# Altium PCB PCB1.PcbDoc (part 3 of 3)
Units mm, origin at the board's own origin, x right, y up, seen from the top; angles counter-clockwise.
Board outline 160 x 120 mm, 2 copper layers (Top Layer, Bottom Layer), stack 1.575 mm thick; 297 components, 194 nets, 893 pads, 504 vias.
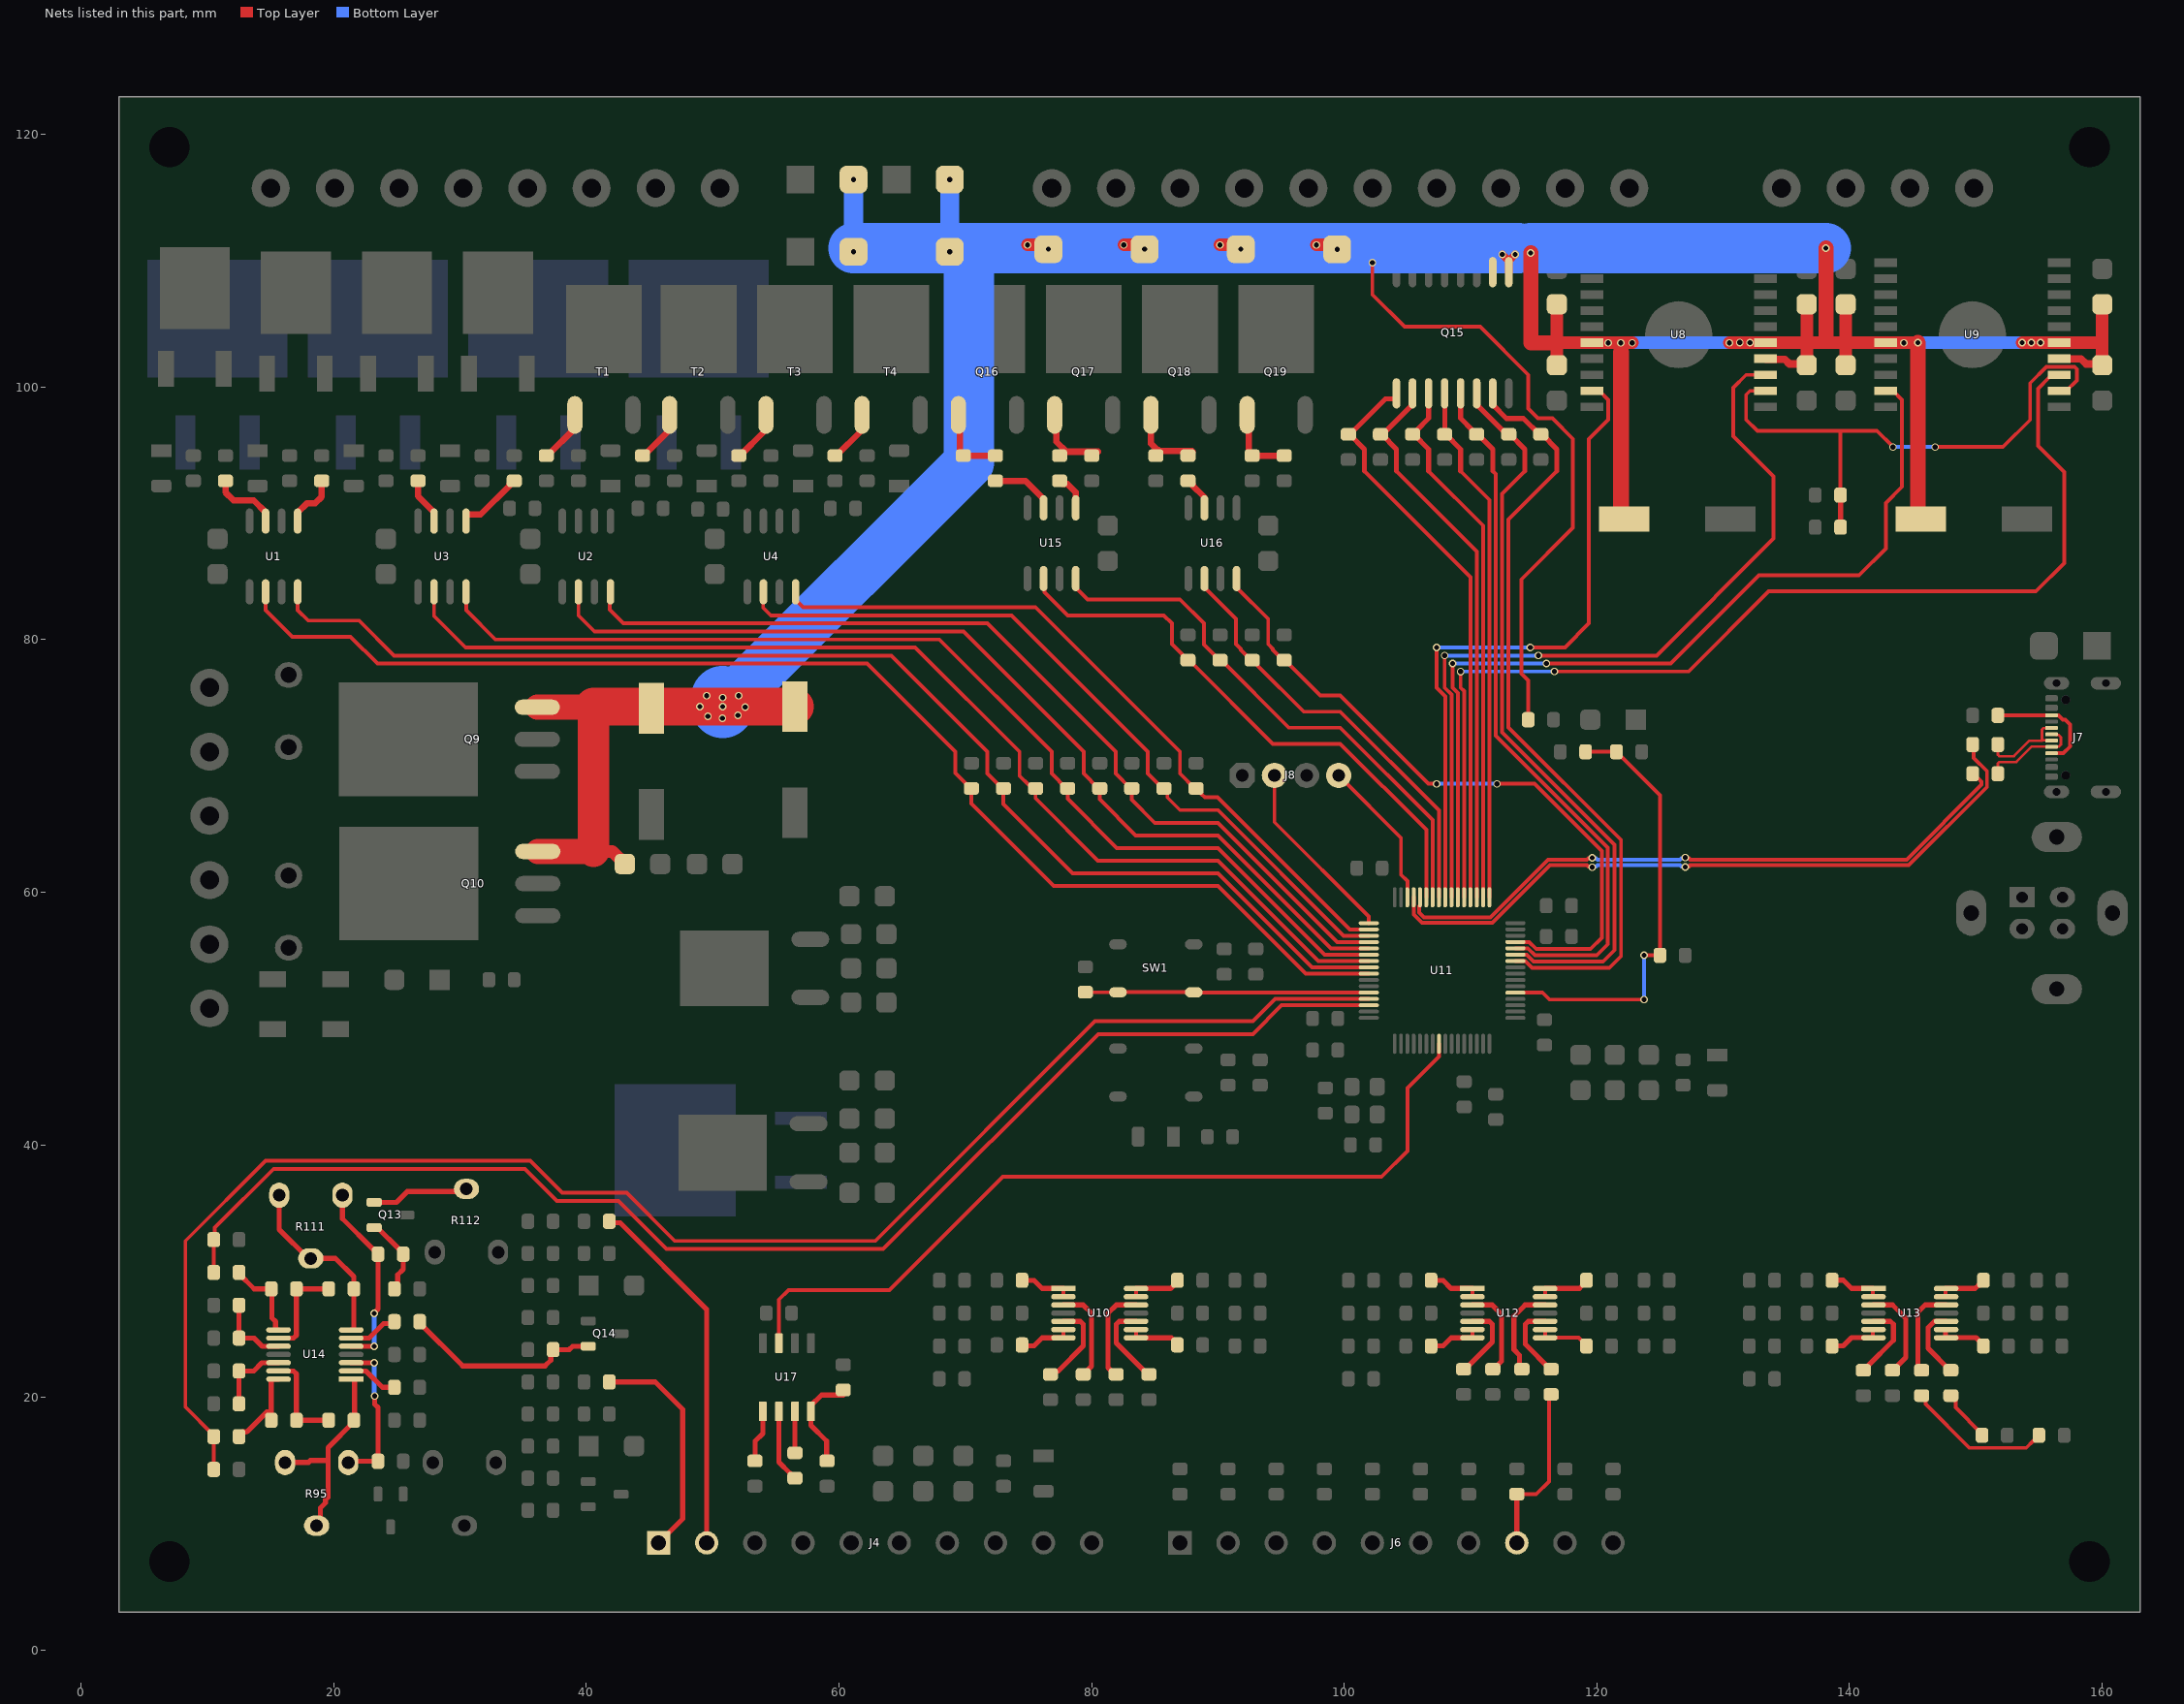
[diagram p3: the nets of this part, all layers, seen from the top]

## Via types
v1: diameter 0.6, hole 0.4, Top Layer to Bottom Layer, 445 vias
v2: diameter 0.7, hole 0.4, Top Layer to Bottom Layer, 59 vias

## Nets (pads, with @x,y where several pads share a name; then routed paths per layer and width w, separated by ;. In a path a pad name is that pad's centre, name@x,y a point inside that pad or via, vN(x,y) a via of type N, cw(c..) or ccw(c..) an arc to the next point about the centre after c; other vN are vias at no path point) (continued)
NetQ13_1: Q13.1 R112.2 | length 7.7
  Top Layer w0.4: Q13.1@23.2,35.444 24.971,35.444 25.821,36.294 30.3,36.294 R112.2@30.508,36.503
NetQ13_2: Q13.2 R109.2 R110.1 | length 6.2
  Top Layer w0.4: Q13.2@23.2,33.444 23.45,33.444 25.189,31.705 25.204,31.705 25.5,31.409 R110.1@25.5,31.336 25.5,30.136 25.069,29.705 25.069,28.863 R109.2@24.8,28.594
NetQ14_2: Q14.2 R118.2 R121.1 | length 15.9
  Top Layer w0.4: R121.1@26.8,25.994 26.8,25.894 30.199,22.495 36.735,22.495 37.194,22.954 37.194,23.604 R118.2@37.37,23.78 38.64,23.78 38.91,24.05 Q14.2@40.15,24.05
NetQ15_1: Q15.1 R125.2 U11.36 | length 46
  Top Layer w0.3: 101.6,93.345 110.005,84.94 110.005,72.598 110,72.593 U11.36@110,59.6
  Top Layer w0.4: R125.2@100.33,96.25 R125.2@100.43,96.25 ; 101.6,93.345 101.6,95.08 R125.2@100.43,96.25 ; Q15.1@104.14,99.495 104.14,99.152 104.048,99.06 103.274,99.06 100.764,96.55 100.757,96.55 100.457,96.25 R125.2@100.43,96.25
NetQ15_2: Q15.2 R126.2 U11.35 | length 44.2
  Top Layer w0.3: 104.14,93.345 110.5,86.985 110.5,77.235 110.505,77.23 110.505,76.44 110.5,76.435 U11.35@110.5,59.6
  Top Layer w0.4: R126.2@102.87,96.25 R126.2@102.97,96.25 ; 104.14,93.345 104.14,95.08 R126.2@102.97,96.25 ; Q15.2@105.41,99.495 105.41,98.595 103.065,96.25 R126.2@102.97,96.25
NetQ15_3: Q15.3 R127.2 U11.34 | length 42.8
  Top Layer w0.3: 106.68,93.345 111,89.025 U11.34@111,59.6
  Top Layer w0.4: R127.2@105.41,96.25 R127.2@105.483,96.25 ; 106.68,93.345 106.68,95.08 105.51,96.25 R127.2@105.483,96.25 ; Q15.3@106.68,99.495 106.68,97.52 105.779,96.619 105.779,96.546 R127.2@105.483,96.25
NetQ15_4: Q15.4 R128.2 U11.33 | length 41.4
  Top Layer w0.3: 109.22,93.345 111.5,91.065 U11.33@111.5,59.6
  Top Layer w0.4: Q15.4@107.95,99.495 107.98,99.465 107.98,96.28 R128.2@107.95,96.25 108.05,96.25 109.22,95.08 109.22,93.345
NetQ15_5: Q15.5 R129.2 U11.28 | length 56.5
  Top Layer w0.3: 111.76,93.345 112,93.105 112,72.404 120.876,63.528 120.876,55.876 120,55 115.1,55 114.55,55.55 U11.28@113.55,55.55
  Top Layer w0.4: Q15.5@109.22,99.495 109.22,97.52 110.121,96.619 110.121,96.546 110.417,96.25 R129.2@110.49,96.25 110.59,96.25 111.76,95.08 111.76,93.345
NetQ15_6: Q15.6 R130.2 U11.27 | length 58.7
  Top Layer w0.3: U11.27@113.55,55.05 114.446,55.05 114.996,54.5 120.5,54.5 121.412,55.412 121.412,63.754 112.5,72.666 112.5,91.545 114.3,93.345
  Top Layer w0.4: Q15.6@110.49,99.495 110.49,98.595 112.566,96.519 112.761,96.519 R130.2@113.03,96.25 113.13,96.25 114.3,95.08 114.3,93.345
NetQ15_7: Q15.7 R131.2 U11.26 | length 61.9
  Top Layer w0.3: U11.26@113.55,54.55 114.342,54.55 114.892,54 121,54 121.92,54.92 121.92,64.135 113,73.055 113,89.505 116.84,93.345
  Top Layer w0.4: Q15.7@111.76,99.495 111.76,98.595 112.842,97.513 114.187,97.513 115.45,96.25 R131.2@115.57,96.25 115.67,96.25 116.84,95.08 116.84,93.345
NetQ15_10: Q15.10
NetQ16_1: Q16.1 R132.1 R133.2 | length 5.6
  Top Layer w0.5: Q16.1@69.455,97.79 69.589,97.656 69.589,94.82 69.839,94.57 R132.1@72.08,94.57
NetQ17_1: Q17.1 R134.1 R135.2 | length 5.8
  Top Layer w0.5: Q17.1@77.075,97.79 77.209,97.656 77.209,95.666 77.995,94.88 78.095,94.88 R135.2@80.5,94.88
NetQ18_1: Q18.1 R138.1 R139.2 | length 5.8
  Top Layer w0.5: Q18.1@84.695,97.79 84.695,95.528 85.22,95.003 85.32,95.003 85.381,94.942 87.939,94.942 R138.1@88,94.88
NetQ19_1: Q19.1 R140.1 R143.2 | length 5.9
  Top Layer w0.5: Q19.1@92.315,97.79 92.449,97.656 92.449,94.82 92.699,94.57 R143.2@95.25,94.57
NetR1_2: R1.2 U1.7 | length 5.4
  Top Layer w0.5: R1.2@11.43,92.57 11.43,91.665 12.065,91.03 13.66,91.03 14.605,90.085 U1.7@14.605,89.385
NetR2_1: R2.1 T1.1 | length 3.2
  Top Layer w0.5: R2.1@36.83,94.57 36.93,94.57 T1.1@39.089,96.729
NetR3_2: R3.2 U1.5 | length 4.4
  Top Layer w0.5: U1.5@17.145,89.385 17.145,90.058 17.898,90.811 18.541,90.811 19.05,91.32 R3.2@19.05,92.57
NetR5_2: R5.2 U1.4 U11.56 | length 99.7
  Top Layer w0.3: U1.4@17.145,83.785 17.145,82.335 17.975,81.505 22,81.505 24.765,78.74 64.135,78.74 71.755,71.12 71.755,69.385 72.925,68.215 R5.2@73.025,68.215 73.025,66.975 78.5,61.5 90,61.5 97.45,54.05 U11.56@101.95,54.05
NetR6_2: R6.2 U1.2 U11.57 | length 102.4
  Top Layer w0.3: U1.2@14.605,83.785 14.605,82.335 16.705,80.235 21.331,80.235 23.461,78.105 62.23,78.105 69.215,71.12 69.215,69.439 70.439,68.215 R6.2@70.485,68.215 70.485,67.015 77,60.5 90,60.5 96.95,53.55 U11.57@101.95,53.55
NetR7_2: R7.2 U2.4 U11.52 | length 74
  Top Layer w0.3: U2.4@41.91,83.785 41.853,83.728 41.853,82.363 42.935,81.28 71.755,81.28 81.915,71.12 81.915,69.385 83.085,68.215 R7.2@83.185,68.215 83.185,67.315 85,65.5 90,65.5 99.45,56.05 U11.52@101.95,56.05
NetR8_2: R8.2 U2.2 U11.53 | length 76.9
  Top Layer w0.3: U2.2@39.37,83.785 39.373,83.782 39.373,81.912 40.64,80.645 69.85,80.645 79.375,71.12 79.375,69.385 80.545,68.215 R8.2@80.645,68.215 80.645,67.355 83.5,64.5 90,64.5 98.95,55.55 U11.53@101.95,55.55
NetR9_1: R9.1 T2.1 | length 4
  Top Layer w0.5: R9.1@44.45,94.57 44.55,94.57 46.461,96.481 T2.1@46.461,97.656
NetR10_2: R10.2 U3.7 | length 3.7
  Top Layer w0.5: R10.2@26.67,92.57 26.67,91.355 27.94,90.085 U3.7@27.94,89.385
NetR12_2: R12.2 U3.5 | length 5.5
  Top Layer w0.5: U3.5@30.48,89.385 30.48,89.864 30.526,89.91 31.63,89.91 33.94,92.22 33.94,92.32 34.19,92.57 R12.2@34.29,92.57
NetR13_2: R13.2 U3.4 U11.54 | length 85.7
  Top Layer w0.3: U3.4@30.48,83.785 30.481,82.335 32.806,80.01 67.945,80.01 76.835,71.12 76.835,69.385 78.005,68.215 R13.2@78.105,68.215 78.105,67.395 82,63.5 90,63.5 98.45,55.05 U11.54@101.95,55.05
NetR14_2: R14.2 U3.2 U11.55 | length 88.8
  Top Layer w0.3: U3.2@27.94,83.785 27.94,81.87 30.435,79.375 66.04,79.375 74.295,71.12 74.295,69.215 75.007,68.503 75.277,68.503 R14.2@75.565,68.215 75.565,67.435 80.5,62.5 90,62.5 97.95,54.55 U11.55@101.95,54.55
NetR15_2: R15.2 U4.4 U11.50 | length 57.9
  Top Layer w0.3: U4.4@56.562,83.785 56.534,83.757 56.534,83.166 57.15,82.55 75.565,82.55 86.995,71.12 86.995,69.385 88.165,68.215 R15.2@88.265,68.215 88.311,68.215 88.715,67.811 88.715,67.765 88.965,67.515 89.985,67.515 100.45,57.05 U11.50@101.95,57.05
NetR16_2: R16.2 U4.2 U11.51 | length 61.3
  Top Layer w0.3: U4.2@54.022,83.785 53.994,83.757 53.994,82.531 54.61,81.915 73.66,81.915 84.455,71.12 84.455,69.385 85.625,68.215 R16.2@85.725,68.215 86,67.94 86,67.5 87,66.5 90,66.5 99.95,56.55 U11.51@101.95,56.55
NetR17_1: R17.1 T3.1 | length 4.2
  Top Layer w0.5: R17.1@52.07,94.57 52.17,94.57 54.081,96.481 54.081,97.656 T3.1@54.215,97.79
NetR19_1: R19.1 T4.1 | length 4.2
  Top Layer w0.5: R19.1@59.69,94.57 59.79,94.57 61.701,96.481 61.701,97.656 T4.1@61.835,97.79
NetR32_1: R32.1 R33.1 U8.2 U9.2 | length 45.4
  Top Layer w0.3: U8.2@133.35,99.695 132.125,99.695 131.82,99.39 131.82,97.415 132.715,96.52 139.295,96.52 ; R32.1@139.295,91.44 139.295,96.52 ; v1(143.45,95.25) 142.18,96.52 139.295,96.52 ; v1(146.79,95.25) 152.16,95.25 154.305,97.395 154.305,100.312 155.593,101.6 157.839,101.6 158.015,101.424 158.015,100.53 157.18,99.695 U9.2@156.605,99.695
  Top Layer w0.4: R33.1@139.295,88.9 R32.1@139.295,91.44
  Bottom Layer w0.3: v1(143.45,95.25) v1(146.79,95.25)
NetR34_1: R34.1 U10.3 | length 7.7
  Top Layer w0.4: U10.3@77.77,27.32 77.774,27.316 79.349,27.316 79.995,26.67 79.995,22.47 79.714,22.189 79.714,22.116 79.418,21.82 R34.1@79.345,21.82
NetR35_2: R35.2 U10.1 U10.2 | length 4.4
  Top Layer w0.3: U10.2@77.77,27.97 U10.1@77.77,28.62
  Top Layer w0.4: R35.2@74.495,29.27 74.643,29.27 74.643,29.418 74.791,29.27 75.445,29.27 76.095,28.62 U10.1@77.77,28.62
NetR38_1: R38.1 U10.5 | length 6.9
  Top Layer w0.4: R38.1@76.745,21.82 77.014,22.089 77.364,22.089 79.345,24.07 79.345,25.786 79.111,26.02 U10.5@77.77,26.02
NetR39_2: R39.2 U10.6 U10.7 | length 4.3
  Top Layer w0.3: U10.7@77.77,24.72 U10.6@77.77,25.37
  Top Layer w0.4: R39.2@74.495,24.152 74.495,24.07 75.445,24.07 76.088,24.713 76.981,24.713 76.984,24.716 77.766,24.716 U10.7@77.77,24.72
NetR42_1: R42.1 U10.12 | length 7.7
  Top Layer w0.4: R42.1@81.945,21.82 81.829,21.82 81.295,22.354 81.295,26.67 81.941,27.316 83.516,27.316 U10.12@83.52,27.32
NetR43_2: R43.2 U10.13 U10.14 | length 4.3
  Top Layer w0.3: U10.13@83.52,27.97 U10.14@83.52,28.62
  Top Layer w0.4: U10.14@83.52,28.62 86.261,28.62 86.795,29.154 R43.2@86.795,29.27
NetR47_1: R47.1 U10.10 | length 6.8
  Top Layer w0.4: U10.10@83.52,26.02 83.516,26.016 82.179,26.016 81.945,25.782 81.945,24.32 84.445,21.82 R47.1@84.545,21.82
NetR48_2: R48.2 U10.8 U10.9 | length 4.2
  Top Layer w0.3: U10.8@83.52,24.72 U10.9@83.52,25.37
  Top Layer w0.4: U10.8@83.52,24.72 86.303,24.72 86.795,24.228 R48.2@86.795,24.155
NetR50_2: R50.2 SW1.2 SW1.3 U11.60 | length 22.5
  Top Layer w0.3: R50.2@79.502,52.086 79.513,52.075 SW1.2@82.09,52.075 82.115,52.1 88.065,52.1 88.115,52.05 U11.60@101.95,52.05
NetR53_1: R53.1 U12.3 | length 7.3
  Top Layer w0.4: U12.3@110.155,27.32 110.159,27.316 111.734,27.316 112.467,26.583 112.467,22.867 111.836,22.236 R53.1@111.763,22.236
NetR54_2: R54.2 U12.1 U12.2 | length 4.2
  Top Layer w0.3: U12.2@110.155,27.97 U12.1@110.155,28.62
  Top Layer w0.4: R54.2@106.88,29.27 107.83,29.27 108.48,28.62 U12.1@110.155,28.62
NetR59_1: R59.1 U12.5 | length 6.2
  Top Layer w0.4: R59.1@109.455,22.236 109.582,22.236 111.73,24.384 111.73,25.786 111.496,26.02 U12.5@110.155,26.02
NetR60_2: R60.2 U12.6 U12.7 | length 4.2
  Top Layer w0.3: U12.7@110.155,24.72 U12.6@110.155,25.37
  Top Layer w0.4: R60.2@106.88,24.07 107.83,24.07 108.473,24.713 109.366,24.713 109.369,24.716 110.151,24.716 U12.7@110.155,24.72
NetR65_1: R65.1 U12.12 | length 7.3
  Top Layer w0.4: R65.1@114.072,22.236 113.88,22.427 113.88,23.336 113.446,23.77 113.446,26.436 114.326,27.316 115.901,27.316 U12.12@115.905,27.32
NetR69_2: R69.2 U12.13 U12.14 | length 4.2
  Top Layer w0.3: U12.13@115.905,27.97 U12.14@115.905,28.62
  Top Layer w0.4: U12.14@115.905,28.62 117.88,28.62 117.892,28.632 118.614,28.632 119.18,29.197 R69.2@119.18,29.27
NetR74_1: R74.1 U12.10 | length 6.1
  Top Layer w0.4: U12.10@115.905,26.02 115.901,26.016 114.564,26.016 114.33,25.782 114.33,24.213 116.307,22.236 R74.1@116.38,22.236
NetR75_2: R75.2 U12.8 U12.9 | length 4.2
  Top Layer w0.3: U12.9@115.905,25.37 U12.8@115.905,24.72 118.576,24.72 119.18,24.116 R75.2@119.18,24.07
NetR77_1: R77.1 U13.3 | length 7.6
  Top Layer w0.4: U13.3@141.905,27.32 143.41,27.32 144.455,26.275 144.455,23.15 143.814,22.509 143.814,22.472 143.486,22.145 R77.1@143.414,22.145
NetR78_2: R78.2 U13.1 U13.2 | length 4
  Top Layer w0.3: U13.1@141.851,28.624 141.851,27.974 U13.2@141.905,27.97
  Top Layer w0.4: R78.2@138.63,29.27 138.63,29.274 R78.2@138.704,29.274 ; R78.2@138.852,29.274 139.506,29.274 140.156,28.624 U13.1@141.851,28.624
NetR81_1: R81.1 U13.5 | length 6.3
  Top Layer w0.4: R81.1@141.105,22.145 141.178,22.145 141.474,22.441 141.474,22.514 143.48,24.52 143.48,25.782 143.246,26.016 141.909,26.016 U13.5@141.905,26.02
NetR82_2: R82.2 U13.6 U13.7 | length 4.2
  Top Layer w0.3: U13.7@141.851,24.724 141.851,25.374 U13.6@141.905,25.37
  Top Layer w0.4: R82.2@138.63,24.07 138.63,24.074 139.506,24.074 140.156,24.724 U13.7@141.851,24.724
NetR85_1: R85.1 U13.12 | length 7.2
  Top Layer w0.4: R85.1@145.722,22.145 145.43,22.437 145.43,26.748 146.002,27.32 147.598,27.32 147.602,27.324 U13.12@147.655,27.32
NetR85_2: R85.2 R87.1 | length 11.7
  Top Layer w0.3: R85.2@145.722,20.145 146.033,19.833 146.033,19.467 149.5,16 154,16 154.55,16.55 154.596,16.55 155,16.954 R87.1@155,17
NetR86_2: R86.2 U13.13 U13.14 | length 4.1
  Top Layer w0.3: U13.14@147.602,28.624 147.602,27.974 U13.13@147.655,27.97
  Top Layer w0.4: U13.14@147.655,28.62 147.602,28.624 147.655,28.624 149.959,28.624 150.236,28.901 150.309,28.901 150.605,29.197 R86.2@150.605,29.27
NetR89_1: R89.1 U13.10 | length 5.8
  Top Layer w0.4: U13.10@147.655,26.02 147.598,26.02 147.594,26.016 146.726,26.016 146.223,25.513 146.223,23.879 147.957,22.145 R89.1@148.03,22.145
NetR89_2: R89.2 R91.1 | length 4.2
  Top Layer w0.3: R89.2@148.03,20.145 148.063,20.145 148.405,19.803 148.405,19.195 150.5,17.1 R91.1@150.5,17
NetR90_2: R90.2 U13.8 U13.9 | length 4.2
  Top Layer w0.3: U13.9@147.602,25.374 U13.9@147.655,25.37
  Top Layer w0.4: U13.9@147.602,25.374 U13.8@147.602,24.724 ; U13.8@147.655,24.72 U13.8@147.602,24.724 ; R90.2@150.731,24.024 150.031,24.724 U13.8@147.602,24.724
NetR94_2: R94.2 R95.1 U14.3 | length 12.1
  Top Layer w0.4: R95.1@21.15,14.844 21.25,14.944 R94.2@23.5,14.944 23.5,19.194 23.238,19.456 v1(23.238,20.106) ; U14.3@21.38,22.744 v1(23.2,22.744)
  Bottom Layer w0.4: v1(23.2,22.744) 23.2,20.144 v1(23.238,20.106)
NetR95_2: R95.2 R95.3 R97.1 U14.1 | length 16.2
  Top Layer w0.4: R95.3@16.15,14.844 18,14.844 18.156,15 19.551,15 ; R95.2@18.65,9.844 18.94,10.135 18.94,11.244 19.351,11.655 19.351,11.894 19.551,12.094 19.551,15 ; U14.1@21.642,21.329 21.642,18.236 R97.1@21.6,18.194 21.6,18.073 19.551,16.024 19.551,15
NetR97_2: R97.2 R98.1 U14.13 | length 7.7
  Top Layer w0.4: U14.13@15.629,22.094 16.816,22.094 17.05,21.86 17.05,18.844 R98.1@17.05,18.194 R97.2@19.6,18.194
NetR98_2: R98.2 R99.1 U14.14 | length 7.2
  Top Layer w0.4: R99.1@12.5,16.894 12.5,16.967 12.796,17.263 13.042,17.263 13.077,17.298 13.15,17.298 14.686,18.834 15.05,18.834 ; R98.2@15.05,18.194 15.05,18.834 ; U14.14@15.629,21.444 15.639,21.435 15.629,21.435 15.05,21.435 15.05,18.834
NetR99_2: R99.2 R101.2 U11.61 | length 126.2
  Top Layer w0.3: R101.2@10.5,14.294 10.5,16.498 10.644,16.642 10.752,16.642 R99.2@10.5,16.894 10.5,16.994 8.255,19.239 8.255,32.385 14.605,38.735 35.56,38.735 38.1,36.195 43.18,36.195 46.99,32.385 50.165,32.385 62.865,32.385 80.264,49.784 92.784,49.784 94.55,51.55 U11.61@101.95,51.55
NetR100_1: R100.1 R103.1 U14.12 | length 6
  Top Layer w0.4: R103.1@12.5,19.494 R100.1@12.5,22.094 13.662,22.094 14.308,22.74 15.626,22.74 U14.12@15.629,22.744
NetR105_2: R105.2 U14.2 | length 4
  Top Layer w0.4: U14.2@21.38,22.094 22.55,22.094 23.85,20.794 R105.2@24.8,20.794
NetR110_2: R110.2 R111.1 U14.5 | length 15.1
  Top Layer w0.4: R111.1@20.688,36.003 20.688,34.148 23.131,31.705 23.204,31.705 23.5,31.409 R110.2@23.5,31.336 23.5,26.998 23.2,26.698 v1(23.2,26.644) ; U14.5@21.38,24.044 v1(23.2,24.044)
  Bottom Layer w0.4: v1(23.2,24.044) v1(23.2,26.644)
NetR111_2: R111.2 R111.3 R113.1 U14.7 | length 14.4
  Top Layer w0.4: R111.3@15.688,36.003 15.688,33.303 17.988,31.003 R111.2@18.009,31.003 ; R111.2@18.188,31.003 20.142,31.003 21.584,29.56 21.584,28.61 R113.1@21.6,28.594 ; U14.7@21.38,25.344 21.59,25.344 21.6,25.354 R113.1@21.6,28.594 ; R113.1@21.6,28.624 R113.1@21.6,28.594
NetR113_2: R113.2 R114.1 U14.9 | length 6.8
  Top Layer w0.4: U14.9@15.905,24.694 16.816,24.694 17.05,24.929 17.05,27.944 ; R114.1@17.05,28.594 R113.2@19.6,28.594
NetR114_2: R114.2 R115.1 U14.8 | length 6.8
  Top Layer w0.4: R115.1@12.5,29.894 12.5,29.794 13.7,28.594 R114.2@15.05,28.594 15.104,28.541 15.104,26.291 15.4,25.994 15.4,25.354 15.41,25.344 U14.8@15.629,25.344
NetR115_2: R115.2 R117.2 U11.62 | length 108.2
  Top Layer w0.3: U11.62@101.95,51.05 95.05,51.05 92.768,48.768 80.518,48.768 63.5,31.75 50.165,31.75 46.355,31.75 42.545,35.56 37.684,35.56 35.144,38.1 15.24,38.1 10.568,33.428 10.568,32.562 R117.2@10.5,32.494 R115.2@10.5,30.291 ; R115.2@10.5,30.291 10.644,30.147 10.752,30.147 R115.2@10.5,29.894 R115.2@10.5,30.291
NetR116_1: R116.1 R119.1 U14.10 | length 6
  Top Layer w0.4: R119.1@12.5,27.294 R116.1@12.5,24.694 13.696,24.694 14.346,24.044 U14.10@15.629,24.044
NetR121_2: R121.2 U14.6 | length 3.7
  Top Layer w0.4: U14.6@21.622,24.694 22.8,24.694 23.949,25.843 24.649,25.843 R121.2@24.8,25.994
NetR136_2: R136.2 U11.42 U15.4 | length 43.7
  Top Layer w0.3: U15.4@78.74,84.83 78.74,84.146 79.701,83.185 86.995,83.185 88.9,81.28 88.9,79.599 90.124,78.375 R136.2@90.17,78.375 90.27,78.375 95.62,73.025 99.695,73.025 107,65.72 107,61.17 107.004,61.166 107.004,60.334 107,60.33 U11.42@107,59.6
NetR137_2: R137.2 U11.43 U15.2 | length 45.5
  Top Layer w0.3: U15.2@76.2,84.83 76.257,84.773 76.257,83.763 78.105,81.915 85.725,81.915 86.36,81.28 86.36,79.645 87.18,78.825 87.18,78.779 87.584,78.375 R137.2@87.63,78.375 87.73,78.375 94.35,71.755 99.695,71.755 106.5,64.95 U11.43@106.5,59.6
NetR141_2: R141.2 U11.29 U16.4 | length 53.8
  Top Layer w0.3: U16.4@91.477,84.83 91.477,84.13 93.98,81.627 93.98,79.645 94.349,79.276 94.349,79.176 95.15,78.375 R141.2@95.25,78.375 95.296,78.375 98.106,75.565 99.695,75.565 106.68,68.58 v1(107.315,68.58) ; v1(112.1,68.58) 115.062,68.58 120.396,63.246 120.396,56.396 119.5,55.5 115.204,55.5 114.654,56.05 U11.29@113.55,56.05
  Bottom Layer w0.3: v1(107.315,68.58) v1(112.1,68.58)
NetR142_2: R142.2 U11.41 U16.2 | length 34.7
  Top Layer w0.3: U16.2@88.937,84.83 88.937,84.13 91.44,81.627 91.44,79.645 91.809,79.276 91.809,79.176 92.61,78.375 R142.2@92.71,78.375 92.756,78.375 93.16,77.971 93.16,77.925 96.79,74.295 99.695,74.295 107.5,66.49 U11.41@107.5,59.6
NetR144_1: R144.1 U17.1 | length 3.8
  Top Layer w0.4: R144.1@53.34,15.37 53.366,15.396 53.366,16.536 53.975,17.145 U17.1@53.975,18.89
NetR145_2: R145.2 R146.2 U17.4 | length 7.4
  Top Layer w0.4: R145.2@59.055,15.37 59.029,15.396 59.029,16.536 57.785,17.78 U17.4@57.785,18.89 57.785,19.365 58.61,20.19 R146.2@60.338,20.19
NetR147_1: R147.1 U17.3 | length 3.3
  Top Layer w0.4: R147.1@56.515,15.605 U17.3@56.515,18.89
NetR147_2: R147.2 U17.2 | length 5.9
  Top Layer w0.4: U17.2@55.245,18.89 55.245,14.875 56.146,13.974 56.146,13.901 56.442,13.605 R147.2@56.515,13.605
NetU8_3: U8.3 U11.39 | length 65.5
  Top Layer w0.3: v1(107.95,78.74) 107.95,76.2 108.5,75.65 U11.39@108.5,59.6 ; v1(115.369,78.74) 124.74,78.74 134,88 134,92.915 130.81,96.105 130.81,99.955 131.82,100.965 U8.3@133.35,100.965
  Bottom Layer w0.3: v1(107.95,78.74) v1(115.369,78.74)
NetU8_19: U8.19 U11.40 | length 52.8
  Top Layer w0.3: v1(107.315,79.375) 107.315,76.2 108,75.515 U11.40@108,59.6 ; v1(114.734,79.375) 117.472,79.375 119.38,81.283 119.38,95.885 120.91,97.415 120.91,98.98 120.195,99.695 U8.19@119.62,99.695
  Bottom Layer w0.3: v1(107.315,79.375) v1(114.734,79.375)
NetU9_3: U9.3 U11.37 | length 86.1
  Top Layer w0.3: v1(109.22,77.47) 109.22,76.2 109.5,75.92 U11.37@109.5,59.6 ; v1(116.65,77.48) 127.264,77.48 133.604,83.82 154.764,83.82 157,86.056 157,93.277 154.94,95.337 154.94,99.875 155.84,100.775 156.03,100.965 U9.3@156.605,100.965
  Bottom Layer w0.3: v1(109.22,77.47) 109.225,77.475 116.645,77.475 v1(116.65,77.48)
NetU9_19: U9.19 U11.38 | length 70.6
  Top Layer w0.3: v1(108.585,78.105) 108.585,76.2 109,75.785 U11.38@109,59.6 ; v1(116.004,78.105) 125.857,78.105 132.842,85.09 140.76,85.09 142.875,87.205 142.875,90.805 144.165,92.095 144.165,98.98 143.45,99.695 U9.19@142.875,99.695
  Bottom Layer w0.3: v1(108.585,78.105) v1(116.004,78.105)
NetU11_8: U11.8 U17.7 | length 67.6
  Top Layer w0.3: U17.7@55.245,24.29 55.245,27.745 56,28.5 64,28.5 72.965,37.465 102.965,37.465 105,39.5 105,44.5 107.5,47 U11.8@107.5,48
OIL-SENSOR: J6.8 R73.1 R74.2 | length 13.8
  Top Layer w0.3: R73.1@113.665,12.335 115.205,12.335 116.205,13.335 116.205,20.061 R74.2@116.38,20.236
  Top Layer w0.4: J6.8@113.665,8.48 R73.1@113.665,12.335
PA_13: J8.4 U11.46 | length 11.9
  Top Layer w0.3: J8.4@99.56,69.25 104.5,64.31 104.5,61.368 105,60.868 U11.46@105,59.6
PA_14: J8.2 U11.49 | length 14.8
  Top Layer w0.3: J8.2@94.48,69.25 94.48,65.54 101.95,58.07 U11.49@101.95,57.55
PWM_GATE_1: R138.2 U16.7 | length 2.7
  Top Layer w0.5: R138.2@87.63,92.57 87.73,92.57 87.98,92.32 87.98,92.22 88.918,91.282 88.918,90.449 U16.7@88.937,90.43
PWM_GATE_2: R134.2 U15.5 | length 2.9
  Top Layer w0.5: R134.2@77.47,92.57 77.72,92.32 78.085,92.32 78.74,91.665 U15.5@78.74,90.43
PWM_GATE_3: R132.2 U15.7 | length 5.1
  Top Layer w0.5: R132.2@72.39,92.57 74.76,92.57 76.2,91.13 U15.7@76.2,90.43
USB_CC: J7.A5 J7.B5 R68.2 | length 9.5
  Top Layer w0.3: R68.2@151.75,74 153.871,74 156.554,74 156.906,73.648 157.1,73.648 157.48,73.268 157.48,71.53 156.95,71 J7.A5@156,71
USB_D_N: J7.A7 J7.B7 R55.2 | length 7.8
  Top Layer w0.203: R55.2@151.75,69.383 151.75,70.19 151.869,70.309 153.219,70.309 154.453,71.543 156,71.543 156.599,71.543 156.748,71.692 156.748,72.271 156.567,72.452 156.398,72.452 156.35,72.5 J7.A7@156,72.5
USB_D_P: J7.A6 J7.B6 R52.2 | length 7.3
  Top Layer w0.203: R52.2@151.75,71.692 151.75,70.885 151.869,70.766 153.03,70.766 154.263,72 155.25,72 ; J7.A6@156,72 155.979,72.021 155.25,72.021 155.25,72.881 155.369,73 J7.B6@156,73
USB_N: R55.1 U11.44 | length 51.8
  Top Layer w0.3: U11.44@106,59.6 106,58.95 105.927,58.877 105.927,58.4 106.327,58 111.567,58 116.132,62.564 119.233,62.564 119.337,62.669 119.577,62.669 v1(119.634,62.726) ; v1(127,62.737) 127.057,62.68 127.297,62.68 127.401,62.576 144.527,62.576 150.46,68.509 150.46,68.758 150.223,68.995 150.092,68.995 149.75,69.338 R55.1@149.75,69.383
  Bottom Layer w0.3: v1(119.634,62.726) 119.691,62.669 119.931,62.669 120.035,62.564 123.348,62.564 123.359,62.576 126.599,62.576 126.703,62.68 126.943,62.68 v1(127,62.737)
USB_P: R52.1 U11.45 | length 55.6
  Top Layer w0.3: U11.45@105.5,59.6 105.5,58.95 105.5,58.223 106.15,57.573 111.744,57.573 116.308,62.137 119.233,62.137 119.337,62.033 119.577,62.033 v1(119.634,61.976) ; v1(127,61.988) 127.057,62.045 127.297,62.045 127.401,62.149 144.704,62.149 150.887,68.332 150.887,69.591 149.837,70.642 149.837,71.605 R52.1@149.75,71.692
  Bottom Layer w0.3: v1(119.634,61.976) 119.691,62.033 119.931,62.033 120.035,62.137 123.525,62.137 123.536,62.149 126.599,62.149 126.703,62.045 126.943,62.045 v1(127,61.988)
VBAT: C5.1 C6.1 C19.2 C20.2 C21.1 C22.2 C23.2 C24.2 C25.2 C26.1 C27.2 C28.2 D1.2 D2.2 D3.2 D4.2 D23.2 D24.2 D25.2 D26.2 F1.1 Q9.3 Q10.3 Q15.9 R63.2 U8.4 U8.5 U8.16 U9.4 U9.5 U9.16 | length 347.3
  Top Layer w0.3: v1(102.235,109.855) 102.235,107.315 104.775,104.775 110.76,104.775 114.57,100.965 114.57,98.28 115.337,97.513 116.497,97.513 118.11,95.899 118.11,88.855 114.02,84.765 114.02,77.32 114.57,76.77 R63.2@114.57,73.66
  Top Layer w0.6: v1(112.522,110.49) 112.535,110.49 Q15.9@113.03,109.995 ; Q15.9@113.03,109.095 Q15.9@113.03,109.995 ; v1(113.538,110.49) 113.525,110.49 Q15.9@113.03,109.995 ; U8.4@133.35,102.235 133.39,102.195 134.885,102.195 135.255,101.825 136.523,101.825 C20.2@136.618,101.73 ; U9.4@156.605,102.235 158.34,102.235 158.75,101.825 159.925,101.825 C25.2@160.02,101.73
  Top Layer w1: 40.562,63.225 42.055,63.225 F1.1@43.05,62.23 ; v1(74.93,111.252) 76.238,111.252 v1(76.58,110.91) ; v1(82.55,111.252) 83.858,111.252 v1(84.2,110.91) ; v1(90.17,111.252) 91.82,111.252 91.82,111.086 91.732,110.998 v1(91.82,110.91) ; v1(97.79,111.252) 98.844,111.252 D26.2@99.318,110.778 ; C19.2@116.84,101.73 116.84,103.505 ; C23.2@116.84,106.55 116.84,103.505 ; 121.92,102.773 121.92,103.48 v1(121.9,103.5) ; v1(122.8,103.5) v1(121.9,103.5) ; v1(130.5,103.5) 130.526,103.526 v1(131.317,103.526) 132.104,103.526 v1(132.125,103.505) U8.5@133.35,103.505 136.618,103.505 ; C20.2@136.618,101.73 136.618,103.505 ; C22.2@136.618,106.55 136.618,103.505 ; C24.2@139.7,101.73 139.7,103.505 ; C28.2@139.7,106.55 139.7,103.505 ; v1(145.415,103.505) 145.41,103.5 142.88,103.5 U9.16@142.875,103.505 139.7,103.505 ; v1(153.67,103.505) v1(154.404,103.505) v1(155.138,103.505) U9.5@156.605,103.505 160.02,103.505 ; C25.2@160.02,101.73 160.02,103.505 ; C27.2@160.02,106.55 160.02,103.505 ; 116.84,103.505 U8.16@119.62,103.505 119.625,103.5 v1(120.9,103.5) v1(121.9,103.5) ; 136.618,103.505 139.7,103.505
  Top Layer w1.2: v1(114.77,110.617) 114.77,103.505 116.84,103.505 ; 138.141,104 138.141,107.106 138.145,107.11 138.145,110.994 v1(138.141,110.998)
  Top Layer w1.25: 121.92,102.773 121.92,89.78 C26.1@122.165,89.535 ; v1(145.415,103.505) 145.415,89.78 C21.1@145.66,89.535
  Top Layer w2: Q9.3@36.117,74.655 40.562,74.655 ; Q10.3@36.157,63.225 40.562,63.225
  Top Layer w2.5: 40.562,63.225 40.562,74.655
  Top Layer w3: 40.562,74.655 40.592,74.685 44.803,74.685 44.93,74.558 C5.1@45.148,74.558 ; C5.1@45.148,74.685 v1(49,74.685) v1(50.8,74.685) C6.1@56.515,74.685
  Bottom Layer w1: v1(120.9,103.5) v1(130.5,103.5) 130.526,103.526 v1(131.317,103.526) 132.039,103.526 v1@132.06,103.505 ; v1(144.3,103.5) 144.305,103.505 v1(153.67,103.505) v1(154.404,103.505) v1(155.138,103.505)
  Bottom Layer w1.5: v2@61.155,110.998 v2(61.155,116.43) ; v2@68.775,110.998 v2(68.775,116.43)
  Bottom Layer w4: v1@52.07,75.79 70.276,93.996 70.276,110.154 ; v2@61.155,110.998 68.775,110.998 71.12,110.998 76.58,110.998 82.55,110.998 90.17,110.998 97.79,110.998 102.235,110.998 113.792,110.998 ; 114.77,110.998 v1(138.141,110.998)
  Bottom Layer w5: v1(50.8,74.685) v1(50.8,75.411)
  other v1: 50.778,73.775 49.626,73.923 52,74 52.58,74.648 49.53,75.565 52.07,75.565 99.44,110.9
  other v2: 61.155,110.715 68.775,110.715
VBAT_ADC: C47.2 R71.1 R72.2 U11.21 | length 35.2
  Top Layer w0.3: U11.21@113.55,52.05 115.7,52.05 116.25,51.5 v1(123.75,51.5) ; R71.1@119.11,71.12 R72.2@121.555,71.12 121.555,71.074 121.959,70.67 122.005,70.67 125,67.675 C47.2@125,55 v1(123.75,55)
  Bottom Layer w0.3: v1(123.75,51.5) v1(123.75,55)
VR_SENSOR_1: J4.1 R106.2 | length 18.1
  Top Layer w0.4: R106.2@41.815,21.225 45.45,21.225 47.625,19.05 47.625,10.385 J4.1@45.72,8.48
VR_SENSOR_2: J4.2 R122.2 | length 29.1
  Top Layer w0.4: R122.2@41.815,33.94 41.936,33.819 42.681,33.819 49.53,26.97 J4.2@49.53,8.48
pads on no net: H1.MH H2.MH H3.MH H4.MH J7. J7.A8 J7.B8 PUSB1.1 PUSB1.2 PUSB1.3 PUSB1.4 PUSB1.SH1 PUSB1.SH2 PUSB1.SH3 PUSB1.SH4 Q9.2 Q10.2 U1.1 U1.8 U2.1 U2.8 U3.1 U3.8 U4.1 U4.8 U8.17 U9.17 U11.3 U11.4 U11.25 U15.1 U15.8 U16.1 U16.8

## Polygon pours and split planes (outlines as drawn)
GND on Top Layer "NONET_L01_P-001" (solid, pour order 32): 4,122 4,4 162,4 162,122
"IGN OUT 3" on Top Layer "IGN_OUT_3_L01_P024" (solid, pour order 24): 21.75,112.75 21.75,104.25 28.25,104.25 28.25,112.75 27,114 27,121.25 23.25,121.25 23.25,114.25
"IGN OUT 1" on Top Layer "IGN_OUT_1_L01_P022" (solid, pour order 22): 5.75,112.5 6.5,113.25 9.25,113.25 13.5,117.5 13.5,121.25 17,121.25 17,115.5 12.25,110.75 12.25,104.25 5.75,104.25
3.3V on Top Layer "3.3V_L01_P020" (solid, pour order 20): 39.37,54.61 36.83,54.61 36.83,50.8 23.495,50.8 23.495,48.26 54.61,48.26 54.61,60.96 42.545,60.96 39.37,60.96
"IGN OUT 4" on Top Layer "IGN_OUT_4_L01_P000" (solid, pour order 0): 36.25,112.25 35.75,112.75 34,112.75 32.25,114.5 32.25,121.25 28,121.25 28,114.5 29.75,112.75 29.75,104.25 36.25,104.25
5V on Top Layer "5V_L01_P001" (solid, pour order 1): 38.735,36.83 36.195,39.37 6.35,39.37 6.35,47.625 54.61,47.625 54.61,33.02 47.625,33.02 43.815,36.83
"IGN OUT 2" on Top Layer "IGN_OUT_2_L01_P023" (solid, pour order 23): 13.75,110.75 13.75,104.25 20.5,104.25 20.465,104.285 20.465,113.215 22.25,115 22.25,121.25 18,121.25 18,115
NetD13_2 on Top Layer "NETD13_2_L01_P025" (solid, pour order 25): 31.5,77.25 31.5,55.5 20.25,55.5 20.25,77.25
GND on Bottom Layer "NONET_L01_P-001" (solid, pour order 31): 4,122 4,4 162,4 162,122
3.3V on Bottom Layer "3.3V_L02_P017" (solid, pour order 17): 54,58.982 54,49 47.5,49 47.5,59.021

## Keep-outs
Keep-Out Layer:
  the board outline again, w0.254

## Silkscreen, mask and mechanical layers (free items; w line width, h text height)
Top Overlay:
  lines w0.254: 57.15,116.205 72.39,116.205 72.39,118.745 57.15,118.745 57.15,116.205
  lines w0.3: 3.81,10.16 3.81,43.18 15.24,43.18 15.24,45.72 24.13,45.72 33.02,45.72 33.02,43.18 41.91,43.18 41.91,35.56 ; 11.43,5.08 41.91,5.08 41.91,10.16 ; 13.97,39.37 13.97,38.221 14.788,37.403 ; 33.788,37.229 34.29,37.73 34.29,39.37 ; 72.39,113.665 72.39,116.205
  text "VR Trigger" at 17.02,42.672 h1.52
  text "Hysteresis" at 27.18,40.132 h1.52
  text "Threshold" at 7.495,39.878 h1.52
  text "Smart Generator Controller" at 70.808,31.898 h8
  text "Alireza Eskandari" at 124.464,11.35 h4.5
  text "0918 479 6877" at 125.73,7.686 h4
Bottom Overlay:
  lines w0.254: 11.43,113.03 53.34,113.03 53.34,119.38 11.43,119.38 11.43,113.03
  lines w0.3: 7.62,53.34 27.94,53.34 ; 7.62,58.42 27.94,58.42 ; 7.62,63.5 27.94,63.5 ; 7.62,68.58 27.94,68.58 ; 7.62,73.66 27.94,73.66 ; 17.78,113.03 17.78,119.38 ; 22.86,113.03 22.86,119.38 ; 27.94,113.03 27.94,119.38 ; 33.02,113.03 33.02,119.38 ; 38.1,113.03 38.1,119.38 ; 40.132,72.771 40.132,89.281 ; 43.18,113.03 43.18,119.38 ; 43.815,26.895 81.915,26.895 81.915,25.595 ; 43.83,26.91 43.83,25.58 43.83,6.53 81.93,6.53 81.93,25.58 ; 43.942,72.771 43.942,89.281 ; 47.64,6.53 47.64,26.895 ; 47.752,72.771 47.752,89.281 ; 48.26,113.03 48.26,119.38 ; 51.45,6.53 51.45,26.895 ; 51.562,72.771 51.562,89.281 ; 53.34,113.03 59.182,107.188 59.182,89.281 ; 55.26,6.53 55.26,26.895 ; 55.372,72.771 55.372,89.281 ; 59.07,6.53 59.07,26.895 ; 59.182,72.771 59.182,89.281 ; 62.88,6.53 62.88,26.895 ; 62.992,72.771 62.992,89.281 ; 66.69,6.53 66.69,26.26 ; 70.5,6.53 70.5,26.895 ; 74.31,6.53 74.31,26.895 ; 74.93,85.95 74.93,85.315 74.93,83.41 93.345,83.41 93.345,84.045 93.345,85.95 ; 78.12,6.53 78.12,26.895 ; 79.39,86.54 79.39,118.29 ; 84.47,86.54 84.47,118.29 ; 88.915,6.53 88.915,31.975 ; 89.55,86.54 89.55,118.29 ; 92.725,6.53 92.725,31.975 ; 94.63,86.54 94.63,118.29 ; 95.885,85.95 95.885,83.455 115.555,83.455 124.505,83.455 124.46,83.5 124.46,85.315 124.46,85.95 ; 96.535,6.53 96.535,31.975 ; 99.71,86.54 99.71,118.29 ; 100.345,6.53 100.345,31.975 ; 104.155,6.53 104.155,31.975 ; 104.79,97.97 104.79,86.54 ; 107.965,6.53 107.965,31.975 ; 109.87,86.54 109.87,87.81 ; 109.87,118.29 109.87,87.81 ; 111.775,6.53 111.775,31.975 ; 114.95,86.54 114.95,118.29 ; 115.585,6.53 115.585,31.975 ; 119.395,6.53 119.395,31.975 ; 120.03,86.54 120.03,118.29 ; 123.19,25.595 123.19,31.975 85.105,31.975 85.105,25.58 85.105,6.53 123.205,6.53 123.205,25.58 ; 137.17,97.97 137.17,118.29 ; 142.25,97.97 142.25,118.29 ; 147.32,66.265 161.925,66.265 ; 147.33,97.97 147.33,118.29 ; 161.925,56.105 161.925,50.39 147.32,50.39 147.32,77.695 147.32,78.33 161.925,78.33 161.925,60.55 ; 43.942,89.281 59.182,89.281 ; 43.942,89.281 36.322,89.281 36.322,72.771 66.802,72.771 66.802,89.281 59.182,89.281 ; 104.79,86.54 125.11,86.54 125.11,118.29 104.79,118.29 ; 104.79,86.54 74.31,86.54 74.31,118.29 104.79,118.29 ; 104.79,86.54 104.79,118.29 ; 109.87,87.81 109.87,87.81 ; 7.62,48.26 27.94,48.26 27.94,78.74 7.62,78.74 7.62,48.26 ; 132.09,97.97 152.41,97.97 152.41,118.29 132.09,118.29 132.09,97.97
  text "--- DBW 1" at 133.868,99.494 h1.52 r270
  text "+++ DBW 1" at 138.948,99.494 h1.52 r270
  text "--- DBW 2" at 144.028,99.494 h1.52 r270
  text "+++ DBW 2" at 149.108,99.494 h1.52 r270
  text "HP LOW SIDE PWM 3" at 76.088,88.064 h1.52 r270
  text "HP LOW SIDE PWM 2" at 81.168,88.064 h1.52 r270
  text "HP LOW SIDE PWM 1" at 86.248,88.064 h1.52 r270
  text "HP LOW SIDE 4" at 91.328,88.064 h1.52 r270
  text "MAIN RELAY OUT" at 96.408,88.064 h1.52 r270
  text "FUEL PUMP RELAY" at 101.488,88.064 h1.52 r270
  text "GAS SOLENID RELAY" at 106.568,88.064 h1.52 r270
  text "AUX RELAY OUT" at 111.648,88.064 h1.52 r270
  text "LP LOW SIDE OUT 1" at 116.728,88.064 h1.52 r270
  text "LP LOW SIDE OUT 2" at 121.808,88.064 h1.52 r270
  text "Electronic / Throttle" at 152.239,86.573 h2
  text "VBAT" at 25.146,75.438 h1.52
  text "COIL 1" at 37.465,73.66 h1.52 r270
  text "COIL 2" at 41.275,73.66 h1.52 r270
  text "COIL 3" at 45.085,73.66 h1.52 r270
  text "COIL 4" at 48.895,73.66 h1.52 r270
  text "INJECTOR 1" at 52.705,73.66 h1.52 r270
  text "INJECTOR 2" at 56.515,73.66 h1.52 r270
  text "INJECTOR 3" at 60.325,73.66 h1.52 r270
  text "INJECTOR 4" at 64.135,73.66 h1.52 r270
  text "Low Power / Low side / 180mA each" at 129.019,72.301 h2
  text "High Power / Low side / 8A" at 94.454,71.968 h2
  text "VBAT" at 25.146,70.358 h1.52
  text "USB" at 150.36,68.035 h3 r270
  text "P GND" at 25.146,65.278 h1.52
  text "P GND" at 25.146,60.198 h1.52
  text "Smart Generator Controller" at 144.495,55.185 h10.5
  text "P GND" at 25.146,55.118 h1.52
  text "INOP" at 150.749,51.279 h1.52 r270
  text "Alireza Eskandari" at 103.151,50.759 h5
  text "P GND" at 25.146,50.038 h1.52
  text "0918 479 6877" at 98.794,45.95 h4
  text "Sensor Inputs / 0 - 5V" at 116.759,31.328 h2
  text "VR GND" at 52.578,13.688 h1.52 r270
  text "IAT SENSOR" at 105.283,13.308 h1.52 r270
  text "OIL SENSOR" at 112.903,13.308 h1.52 r270
  text "MAP SENSOR" at 101.473,13.181 h1.52 r270
  text "CLT SENSOR" at 109.093,13.181 h1.52 r270
  text "--- EGT" at 56.388,12.927 h1.52 r270
  text "+++ EGT" at 60.198,12.927 h1.52 r270
  text "SENSOR 5VA" at 64.008,10.641 h1.52 r270
  text "SENSOR 5VA" at 67.818,10.641 h1.52 r270
  text "SENSOR GND" at 71.628,10.641 h1.52 r270
  text "SENSOR GND" at 75.438,10.641 h1.52 r270
  text "SENSOR GND" at 79.248,10.641 h1.52 r270
  text "ETB 1 SENSOR 1" at 86.233,10.515 h1.52 r270
  text "ANALOG INPUT 1" at 116.713,10.515 h1.52 r270
  text "ETB 2 SENSOR 1" at 93.853,10.388 h1.52 r270
  text "ETB 1 SENSOR 2" at 90.043,10.261 h1.52 r270
  text "ANALOG INPUT 2" at 120.523,10.261 h1.52 r270
  text "VR SENSOR 1" at 44.958,10.134 h1.52 r270
  text "ETB 2 SENSOR 2" at 97.663,10.134 h1.52 r270
  text "VR SENSOR 2" at 48.768,9.88 h1.52 r270
  text "Revision A / 2025/8" at 153.22,9.834 h2

## Text inside footprints (layer, text, board x,y; h text height)
H1: Top Overlay "3.2" at 8.397,116.46 h1.02 r45
H2: Top Overlay "3.2" at 8.397,4.46 h1.02 r45
H3: Top Overlay "3.2" at 160.397,4.46 h1.02 r45
H4: Top Overlay "3.2" at 160.397,116.46 h1.02 r45
J7: Mechanical 13 "PCB EDGE" at 163.2,78.25 h1.02 r270